# Altium PCB MCORD_AFE.PCBDOC (part 2 of 3)
Units mil, origin at the board's own origin, x right, y up, seen from the top; angles counter-clockwise.
Board outline 2755.91 x 787.4 mil, 4 copper layers (TOP, G1, PWR, BOT), stack 58.685 mil thick; 135 components, 89 nets, 442 pads, 254 vias.
Unrouted connection lines stored in the file: 2.
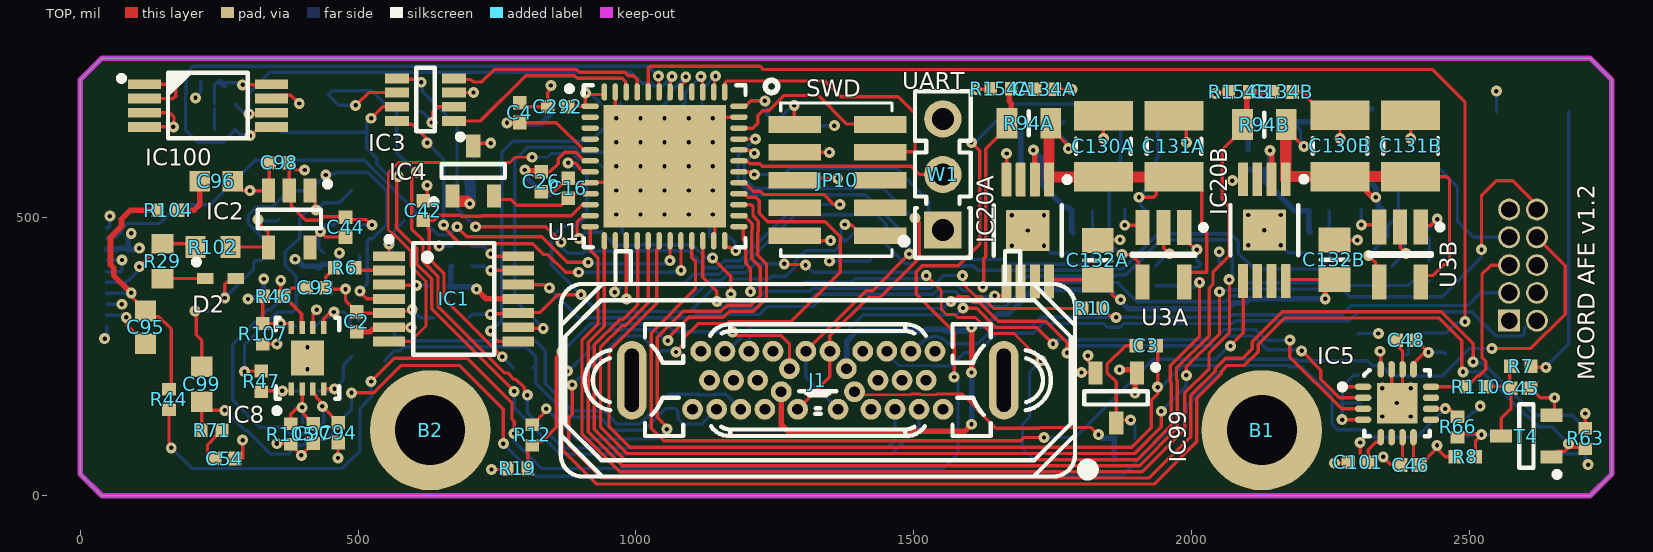
[diagram p0: TOP view]

## Part data (continued)
R152A R152B: library part R0603_10k_1%_0.1W_100PPM, "Resistor - 1%", Case=0603, Manufacturer=GENERIC, Manufacturer1 ComponentHeight=0.55mm, Manufacturer1 Example="NIC COMPONENT", Manufacturer1 Part Number=NRC06F1002TRF, Manufacturer Part Number=R0603_10K_1%_0.1W_100PPM, Power=0.1W, Tolerance=±1%, Author="CERN DEM JLC", Component Type=Standard, CreateDate=03.12.2007, HelpURL=\\cern.ch\dfs\Applications\Altium\Datasheets\R0603_NIC_NRC.pdf, LatestRevisionDate=13.03.2008, Mounted=Yes, Part Description="General Purpose Thick Film Chip Resistor", Part Number=R0603_10K_1%_0.1W_100PPM, Pin Count=2, PressFit=No, Sense=No, SMD=Yes, Socket=No, Status=Preferred, TC=±100ppm/°C
R153A R153B: library part R0603_75K_1%_0.1W_100PPM, "Resistor - 1%", Case=0603, Manufacturer=GENERIC, Manufacturer1 ComponentHeight=0.55mm, Manufacturer1 Example="NIC COMPONENT", Manufacturer1 Part Number=NRC06F7502TRF, Power=0.1W, Tolerance=±1%, Author="CERN DEM JLC", Component Type=Standard, CreateDate=03.12.2007, HelpURL=\\cern.ch\dfs\Applications\Altium\Datasheets\R0603_NIC_NRC.pdf, LatestRevisionDate=13.03.2008, Manufacturer Part Number=R0603_75K_1%_0.1W_100PPM, Mounted=Yes, Part Description="General Purpose Thick Film Chip Resistor", Part Number=R0603_75K_1%_0.1W_100PPM, Pin Count=2, PressFit=No, Sense=No, SMD=Yes, Socket=No, Status=Preferred, TC=±100ppm/°C
T1 T4 T5: "N-CHANNEL MOSFET WITH DIODE", Case=SOT23-3, Manufacturer=NEXPERIA, Author="CERN DEM JLC", Bonding=No, Component Type=Standard, ComponentHeight=1.1mm, CreateDate=16/03/2010, Device=BSH103, HelpURL=\\cern.ch\dfs\Applications\Altium\Datasheets\BSH103.pdf, LatestRevisionDate=20/06/2017, Manufacturer Part Number=BSH103, Mounted=Yes, PackageDescription="SOT23, 3 pin, Pitch 0.95mm - 1.3mm W X 2.9mm L X 1.1mm H, IPC Medium Density", Part Description="30V 850mA N-Channel Enhancement Mode Field-Effect Transistor", Part Number=BSH103, Pin Count=3, PressFit=No, Sense=No, SMD=Yes, Socket=No
TP1 TP2 TP3 TP4 TP5A TP5B TP44: library part SMD_PAD_1.27X1.27MM, Author="CERN DEM JLC", ComponentHeight=0mm, Component Type="Standard (No BOM)", CreateDate=12.01.2008, Family="Test Point", HelpURL=Undefined, LatestRevisionDate=12.01.2008, Mounted=No, PackageDescription="1.27mm x 1.27mm PCB Copper Area (SMD Test Point)", Part Description="1.27mm x 1.27mm PCB Copper Area (SMD Test Point)", Part Number=SMD_PAD_1.27X1.27MM, Pin Count=1, Sense=No, SMD=Yes, Socket=No, Status=None
U1: library part CMP-0304-00173-2, "ARM Cortex-M0 32-bit MCU, 128 KB Flash, 16 KB Internal RAM, 37 I/Os, 48-Pin UFQFPN, -40 to 85 degC, Tray", I/Os (High Current)=37, Manufacturer=STMicroelectronics, Operating Frequency(F) (Processor speed) (MHz)=48, Package Description="48-Pin Ultra Thin Fine Pitch Quad Flat No-Lead, 7 x 7 x 0.6 mm Body, 0.5 mm Pitch, Exposed Pad", Package Reference=UFQFPN48, Supply Voltage(Vcc) min (V)=2, ComponentLink1Description="Manufacturer URL", ComponentLink1URL=http://www.st.com/, ComponentLink2Description=Datasheet, ComponentLink2URL=http://www.st.com/st-web-ui/static/active/en/resource/technical/document/datasheet/DM00090510.pdf, Core="ARM Cortex-M0", D/A Converter=1, DatasheetVersion="Rev. 5", FLASH Size (Prog) (kB)=128, Internal RAM Size (kB)=16, Mounting Technology="Surface Mount", Packing=Tray, PartNumber=STM32F072CBU6
U3A U3B: library part CMP-0359-01901-2, "Single Channel, High Voltage, High-Side Current Sense Operational Amplifier, 0.2 MHz Typical GBW, 4 to 60 V, 5-Pin SOT23 (S5-5), Commercial, Reel", Linear Technology Part Number=LTC6101HV, Manufacturer="Linear Technology", Channels (#)=1, Code_JEDEC=MO-193, ComponentLink1Description="Manufacturer URL", ComponentLink1URL=http://www.linear.com/, ComponentLink2Description=Datasheet, ComponentLink2URL=http://cds.linear.com/docs/en/datasheet/6101fh.pdf, ComponentLink3Description="Package Specification", ComponentLink3URL=http://cds.linear.com/docs/en/packaging/SOT_5_05-08-1635.pdf, DatasheetVersion="Rev. H", GBW (MHz) Typical=0.2, Is (mA) Typical=0.22, Mounting Technology="Surface Mount", PackageDescription="5-Lead Plastic TSOT-23, Body 1.63 x 2.90 mm, Pitch 0.95 mm", PackageReference=LT-S5-5-TSOT-23, Packing=Reel, PartNumber=LTC6101HVCCS5#TR, RevisionNote="URLs updated", Type=CSA, Vos (mV) Typical=0.15, Vs Max (V)=60, Vs Min (V)=4
W1: library part SAMTEC_HTSW-103-23-L-S, "3 Mini Wire-Wrap Contact Strip Header", Manufacturer=SAMTEC, Manufacturer Part Number=HTSW-103-23-L-S, Author="CERN DEM JLC", Component Type=Standard, ComponentHeight=8.38mm, CreateDate=22/02/2018, Family="Header 3", HelpURL=\\cern.ch\dfs\Applications\Altium\Datasheets\SAMTEC_HTSW-103-23-L-S.pdf, LatestRevisionDate=22/02/2018, Mounted=Yes, Part Description="3 Contacts, Pitch 2.54mm, Single Row  Through Mount Straight Header (Post Lead 5.84mm, Tail Lead 2.92mm, Insulator 2.54mm)", Part Number=SAMTEC_HTSW-103-23-L-S, Pin Count=3, PressFit=No, Sense=No, SMD=No, Socket=No, Status=Preferred, Status Comment="High Temperature"

## Via types
v1: diameter 19.68, hole 7.87, TOP to BOT, tented both sides, 254 vias

## Nets (pads, with @x,y where several pads share a name; then routed paths per layer and width w, separated by ;. In a path a pad name is that pad's centre, name@x,y a point inside that pad or via, vN(x,y) a via of type N, cw(c..) or ccw(c..) an arc to the next point about the centre after c; other vN are vias at no path point)
AFE0_OFFSET: C6.2 IC1.4 R51.2 R106.2 | length 638.6
  TOP w6: v1(442,577) v1@443.76,578.76 ; v1@503.05,362.94 506.76,362.94 515.47,354.24 IC1.4@555.86,354.24
  BOT w6: R51.2@329,461.71 324.8,465.92 324.8,467.11 302.29,489.61 302.29,504.39 316.82,518.92 346.02,518.92 366.8,539.69 367.58,539.69 376,548.11 R106.2@376,548.9 414.98,548.9 423.39,557.32 423.39,558.39 v1(442,577) 444.62,579.62 457.37,579.62 460.01,582.26 517.37,582.26 551.31,548.32 551.31,487.8 525.94,462.42 520.41,462.42 516.9,458.9 C6.2@516.9,419.85 516.9,381.58 v1(503.3,367.98) ; C6.2@503.05,405.42 C6.2@503.05,431.47
AFE1_OFFSET: IC1.12 J2.10 | length 2114.7
  TOP w6: IC1.12@788.14,379.83 834.77,379.83 840.68,373.92 v1(844.38,373.92) ; v1(2521.18,442.76) 2521.18,540.04 2548.14,567 2577.61,567 2621,523.61 J2.10@2621,514.96
  BOT w6: v1(844.38,373.92) 844.38,373.15 897.13,320.4 1102.47,320.4 1108.22,326.16 1222.55,326.16 1236.93,340.54 1319.36,340.54 1330.36,351.54 1539.12,351.54 1555.13,367.55 1574.07,367.55 1584.34,357.28 1597.9,357.28 1608.26,346.92 1627.01,346.92 1633.85,340.08 1645.21,340.08 1645.28,340.16 1664.81,340.16 1708.32,383.66 1866.58,383.66 1901.09,349.16 2059.85,349.16 2070.61,359.92 2089.32,359.92 2101.38,371.99 2270.34,371.99 2284.35,357.98 2450.25,357.98 2521.18,428.91 v1(2521.18,442.76)
CAL0_N: IC5.3 J1.B3 | length 1265.7
  TOP w6: v1(1588.35,337.88) 1589.04,337.18 1612.75,337.18 1647.28,302.66 1721.05,302.66 v1(1750.37,273.34) ; v1(2176.57,280.29) 2176.57,249.59 2269.57,156.59 IC5.3@2308.39,156.59
  BOT w6: J1.B3@1203.33,260 1204.28,260.95 1204.28,284.19 1214.58,294.49 1377.24,294.49 1408.67,325.92 1576.39,325.92 v1(1588.35,337.88) ; v1(1750.37,273.34) 1757.87,280.84 2039.51,280.84 2057.67,299 2115.18,299 2134.39,279.79 2176.07,279.79 v1(2176.57,280.29)
CAL0_P: IC5.2 J1.B2 | length 1309.5
  TOP w6: v1(1566.68,349.71) 1570.38,349.71 1578.72,358.05 1596.87,358.05 1606.73,348.18 1617.31,348.18 1651.83,313.66 1737.34,313.66 1775.85,275.15 v1(1775.85,257.16) ; v1(2197.58,260.79) 2232.27,226.11 2232.27,209.45 2265.44,176.27 IC5.2@2308.39,176.27
  BOT w6: J1.B2@1160.02,260 1164.23,260 1210.05,305.82 1367.07,305.82 1398.17,336.92 1552.82,336.92 1565.61,349.71 v1(1566.68,349.71) ; v1(1775.85,257.16) 1779.09,257.16 1791.78,269.84 2044.07,269.84 2061.5,287.28 2111.35,287.28 2136.18,262.45 2195.93,262.45 v1(2197.58,260.79)
CAL_IN: IC5.12 J2.5 R110.2 | length 340.7
  TOP w6: IC5.12@2430.44,195.96 R110.2@2492.5,195.96 2494.57,195.96 2514.77,216.16 2517.4,216.16 2528.84,227.61 2528.84,242.39 2522.16,249.08 2522.16,398.2 2538.92,414.96 J2.5@2571,414.96
CAN_H: D121.1 IC3.7 J1.A2 TP1.1 | length 1670.5
  TOP w6: v1(523.68,679.18) 544.31,699.82 IC3.7@570,699.82 ; v1(572.43,574.32) 570,571.89 570,488.76 568.77,487.53 568.77,482.56 606,445.32 606,416.89 632.82,390.07 632.82,336.03 v1(781,187.85)
  BOT w6: TP1.1@361,654.06 D121.1@515.5,654.06 ; v1(523.68,679.18) 515.5,671.01 D121.1@515.5,654.06 ; v1(572.43,574.32) 569.81,576.93 553.81,576.93 534,596.74 534,607 515.5,625.5 D121.1@515.5,654.06 ; v1(781,187.85) 781,157.89 863.84,75.05 1459.5,75.05 1509.43,124.98 J1.A2@1509.43,155.67
CAN_L: D121.2 IC3.6 J1.A3 TP2.1 | length 1683.4
  TOP w6: v1(495.84,702.33) 518.91,725.41 IC3.6@570,725.41 ; v1(604.98,582.26) 596.8,574.07 596.8,479.77 617,459.56 617,421.45 643.82,394.63 643.82,340.58 763.45,220.96 769.07,220.96 781,209.03 785.05,209.03 798.84,195.24 798.84,190.75 804.76,184.84 v1(804.76,181.13)
  BOT w6: v1(495.84,702.33) 465.28,702.33 TP2.1@446.11,721.5 453.47,728.87 D121.2@515.5,728.87 524.36,728.87 548.39,704.84 554.59,704.84 569.81,689.62 569.81,617.43 v1(604.98,582.26) ; v1(804.76,181.13) 804.76,149.69 868.4,86.05 1452.37,86.05 1466.13,99.81 J1.A3@1466.13,155.67
CAN_MOD: IC3.8 U1.20 | length 753.8
  TOP w6: IC3.8@570,673.62 575.25,668.37 597.6,668.37 624.51,641.45 v1(624.51,634.98) ; v1(654,487.05) 654,482.77 683.5,453.27 814.59,453.27 833.9,433.96 841.54,433.96 873.35,402.16 v1(896.94,402.16) ; v1(1081.05,405.42) U1.20@1081.05,458.71
  BOT w6: v1(624.51,634.98) 654,605.49 v1(654,487.05) ; v1(896.94,402.16) 1077.79,402.16 v1(1081.05,405.42)
CAN_MOD2: IC3.5 U1.29 | length 1288
  TOP w6: IC3.5@570,751 571.95,749.05 610.18,749.05 610.18,747.42 v1(613.69,743.9) ; v1(711.55,484) 837.74,484 v1(865.36,456.38) ; U1.29@1185.38,563.04 1196.2,563.04 1211.24,548 1223.32,548 1229.25,542.08 1338.24,542.08 1356.32,524 v1(1367,524)
  BOT w6: v1(613.69,743.9) 615.57,742.03 615.57,728.12 678,665.68 678,517.32 711.32,484 v1(711.55,484) ; v1(865.36,456.38) 864.14,455.16 864.14,450.19 877.76,436.57 905.33,436.57 908.77,440 1001.12,440 1001.97,440.84 1094.32,440.84 1125.01,410.16 1146.02,410.16 1158.86,423 1188.05,423 1289.05,524 v1(1367,524)
CAN_RX: IC3.4 U1.45 | length 371.8
  TOP w6: IC3.4@672.36,751 674.52,748.84 703.02,748.84 707.33,744.52 723.03,744.52 745.35,766.84 893.77,766.84 898.61,762 979.97,762 986.12,755.84 995.44,755.84 1002.31,748.98 U1.45@1002.31,726.43
CAN_TX: IC3.1 U1.46 | length 366.4
  TOP w6: IC3.1@672.36,674.23 719.86,674.23 801.47,755.84 889.21,755.84 894.05,751 975.41,751 981.89,744.52 981.89,727.16 U1.46@982.62,726.43
CC1: R13.1 U1.25 | length 1054.5
  TOP w5: v1(1522.35,395.93) 1549.34,368.95 1549.34,335.3 1552.27,332.37 1552.76,332.37 1558.86,326.26 1573.2,326.26 1578.92,320.54 1610.99,320.54 1639.37,292.16 1679.91,292.16 v1(1729.11,242.95)
  TOP w6: U1.25@1185.38,484.3 1191.43,484.3 1193.2,482.52 1193.2,460.94 1197.44,456.7 1197.44,418.15 1206.05,409.54 v1(1206.05,367.28)
  BOT w5: v1(1729.11,242.95) 1708.32,222.16 1708.32,141.42 1695.35,128.45 1695.35,85.61 1715.96,65 1821.59,65 R13.1@1822.46,64.13
  BOT w6: v1(1206.05,367.28) 1209.26,367.28 1220.98,379 1299.21,379 1304.75,384.54 1387.54,384.54 1393.29,390.28 1516.7,390.28 v1(1522.35,395.93)
CC2: R12.1 U1.26 | length 841.8
  TOP w6: R12.1@813.15,127.91 813.94,127.91 836.07,150.05 836.07,153.92 v1(838.69,156.54) ; v1(1055.6,119.72) 1055.6,123.42 1052.77,126.26 1052.77,126.56 1038.28,141.05 1038.28,284.92 1085.22,331.87 1152.9,331.87 1163.9,342.87 1206.87,342.87 1223.89,359.89 1223.89,411.35 1208.44,426.8 1208.44,478.26 1209.13,478.95 1209.13,489.65 1199.76,499.02 1199.76,499.39 1195.16,503.98 U1.26@1185.38,503.98
  BOT w6: v1(838.69,156.54) 893.14,102.09 1037.97,102.09 v1(1055.6,119.72)
DC_LEVEL_MEAS0: C42.2 R9.1 U1.10 | length 645.8
  TOP w6: v1(759.52,250.12) 654.82,354.82 654.82,399.18 628,426.01 628,477.85 626.2,479.65 626.2,486.08 C42.2@617,495.28 637,495.28 646.61,504.89 683.64,504.89 685.53,503 722.56,503 723.03,503.47 883.2,503.47 903.4,523.67 U1.10@917.66,523.67
  BOT w6: v1@759.52,250.08 778.5,231.1 R9.1@778.5,230.31
DC_LEVEL_MEAS1: C43.2 R10.2 U1.11 | length 1093.6
  TOP w5: 1594,375.77 1611.08,358.68 1621.66,358.68 1643.68,336.66 1802.43,336.66 R10.2@1802.96,337.18
  TOP w6: v1(897.97,462.6) 893.91,466.66 893.91,492.1 905.79,503.98 U1.11@917.66,503.98 ; v1(1138,428) 1138,427.55 1170.71,394.84 v1(1170.71,362.94) ; v1(1587.59,396.12) 1590.21,393.5 1590.21,379.56 1594,375.77
  BOT w6: v1(897.97,462.6) 909.74,474.36 C43.2@939.67,474.36 954.9,459.14 954.9,458.84 962.74,451 996.57,451 997.41,451.84 1101.48,451.84 1125.32,428 v1(1138,428) ; v1(1170.71,362.94) 1171.31,362.94 1184.33,349.92 1198.17,349.92 1198.66,349.44 1214.72,349.44 1233.28,368 1312.6,368 1318.14,373.54 1530.01,373.54 1552.59,396.12 v1(1587.59,396.12)
DET_OUT0_N: J1.A10 R103.2 | length 769.8
  BOT w6: R103.2@560.18,303.26 564.95,298.49 564.95,290.09 568.47,286.58 575.44,286.58 583.05,278.97 818.76,278.97 836.66,261.06 836.66,201.2 885.16,152.71 942.74,152.71 966.48,128.97 1007.02,128.97 1027.28,149.22 1027.28,149.69 1059.96,182.37 1113.01,182.37 1114.25,181.13 1132.96,181.13 ; 1138.12,181.4 1138.56,181.84 1139.96,181.84 1140.49,182.37 1161.87,182.37 J1.A10@1188.57,155.67
DET_OUT0_P: J1.A11 R9.2 R48.2 | length 749.9
  BOT w6: R48.2@548.14,243.34 565.59,260.79 575.11,260.79 582.29,267.97 802.05,267.97 819.5,250.52 R9.2@819.5,234.31 ; R9.2@815.5,230.31 R9.2@819.5,234.31 ; J1.A11@1145.26,155.67 1118.56,128.97 1084.91,128.97 1076.32,137.56 1076.32,143.55 1075.25,144.61 1075.25,152.19 1073.18,154.26 1070.37,157.07 1053.64,157.07 1014.54,117.97 958.27,117.97 934.53,141.71 880.6,141.71 819.5,202.81 R9.2@819.5,234.31
DET_OUT1_N: J1.B10 J2.2 | length 1264.6
  BOT w5: J1.B10@1451.36,260 1451.36,256.43 1471.66,236.13 1473.76,234.04 1489.77,234.04 1490.01,233.8 1511.14,233.8 1511.38,234.04 1533.08,234.04 1533.82,233.3 1544.92,233.3
  BOT w6: 1544.92,233.3 1566.47,233.3 1590.32,257.16 1614.61,257.16 1649.61,292.16 1714.96,292.16 1732.8,310 1840.96,310 1847.8,303.16 1871.39,303.16 1878.23,310 2073.01,310 2077.94,314.92 2282.86,314.92 2299.15,331.21 2504.07,331.21 2548,287.28 2594,287.28 2598.69,291.96 2598.69,301.68 2602.2,305.19 2611.97,314.96 J2.2@2621,314.96
DET_OUT1_P: J1.B11 J2.3 R10.1 | length 1161
  TOP w6: R10.1@1839.97,337.18 1839.97,336.4 1852.74,323.62 1861.38,323.62 v1(1864,321)
  BOT w6: J1.B11@1494.67,260 1521.49,281 cw(c1537.98,260) 1555.9,279.79 1563.06,273.34 1615.23,273.34 1645.05,303.16 1710.4,303.16 1728.25,321 v1(1864,321) ; v1@1864,314.16 1870.84,321 2068.46,321 2073.38,325.92 2270.06,325.92 2286.35,342.21 2496.24,342.21 2518.99,364.96 J2.3@2571,364.96
EN_CAL_PULSE0: R67.1 T5.1 U1.28 | length 3136.5
  TOP w6: v1(885.28,199.6) 885.28,146.39 879.05,140.16 879.05,90.65 937.7,32 1923.96,32 1998.24,106.29 1998.24,180.37 2042.08,224.2 2042.08,228.08 2061.46,247.46 2092.06,247.46 2108.64,264.05 2108.64,276.88 2162.61,330.85 2448.87,330.85 2506.33,273.39 v1(2506.33,240.85) ; v1(1072.12,258.65) 1072.12,259.1 1085.22,272.2 1085.22,283.24 1111.85,309.87 1163.63,309.87 1166.61,312.84 1278.35,312.84 1367.84,402.33 1367.84,466.39 1343.77,490.47 1343.57,490.47 1341.01,493.03 1236.86,493.03 1221.76,508.13 1221.76,530.83 1215.59,537 1201.64,537 1195.29,543.35 U1.28@1185.38,543.35
  BOT w6: v1(885.28,199.6) 973.08,287.4 1010.05,287.4 1036.29,261.16 1069.61,261.16 v1(1072.12,258.65) ; v1(2506.33,240.85) 2508.94,238.23 2524.57,238.23 2618.02,144.78 T5.1@2647.25,144.78 2684.18,144.78 2707.42,121.54 R67.1@2708.21,121.54
EN_CAL_PULSE1: R63.1 T4.1 U1.27 | length 2988.9
  TOP w6: v1(876.51,224.33) 876.51,220.62 867.44,211.56 867.44,192.21 867.96,191.69 867.96,82.3 929.26,21 1932.63,21 2009.24,97.61 2009.24,175.81 2053.08,219.65 2053.08,223.52 2063.93,234.38 2094.53,234.38 2119.64,259.49 2119.64,272.32 2167.17,319.85 2444.31,319.85 2485.47,278.69 2485.47,225.62 v1(2488.09,223.01) ; v1(1057.59,279.01) 1057.59,283.63 1094.83,320.87 1157.46,320.87 1168.46,331.87 1211.42,331.87 1234.89,355.33 1234.89,417.39 1219.44,432.84 1219.44,473.71 1220.13,474.39 1220.13,494.21 1210.76,503.58 1210.76,520.15 1207.24,523.67 U1.27@1185.38,523.67 ; T4.1@2647.25,69.97 2657.04,79.77 2671.03,79.77 2678.74,87.48 2705.26,87.48 R63.1@2708.21,84.53
  BOT w6: v1(876.51,224.33) 878.11,224.33 952.19,298.4 1033.89,298.4 1053.28,279.01 v1(1057.59,279.01) ; v1(2488.09,223.01) 2523,223.01 2601.22,144.78 2602.47,144.78 2623.26,123.98 2647.69,123.98 v1(2678.16,93.51)
EN_HV0: IC20A.5 U1.22 | length 693.7
  TOP w6: U1.22@1120.42,458.71 1120.16,458.45 1120.16,393.28 1145.51,367.93 v1(1145.51,349.71) ; v1(1645.29,359.57) 1645.59,359.87 1660.72,359.87 1666.57,365.73 IC20A.5@1666.57,385.73
  BOT w6: v1(1145.51,349.71) 1156.3,338.92 1193.62,338.92 1194.1,338.44 1219.28,338.44 1232.37,351.54 1311.69,351.54 1322.69,362.54 1534.56,362.54 1550.58,378.55 1578.63,378.55 1588.9,368.28 1602.46,368.28 1612.81,357.92 1643.64,357.92 v1(1645.29,359.57)